# EAGLE board RP2040_MainV1_alternateLayout-LAPTOP-I81BU10P (EAGLE 9.6.2)
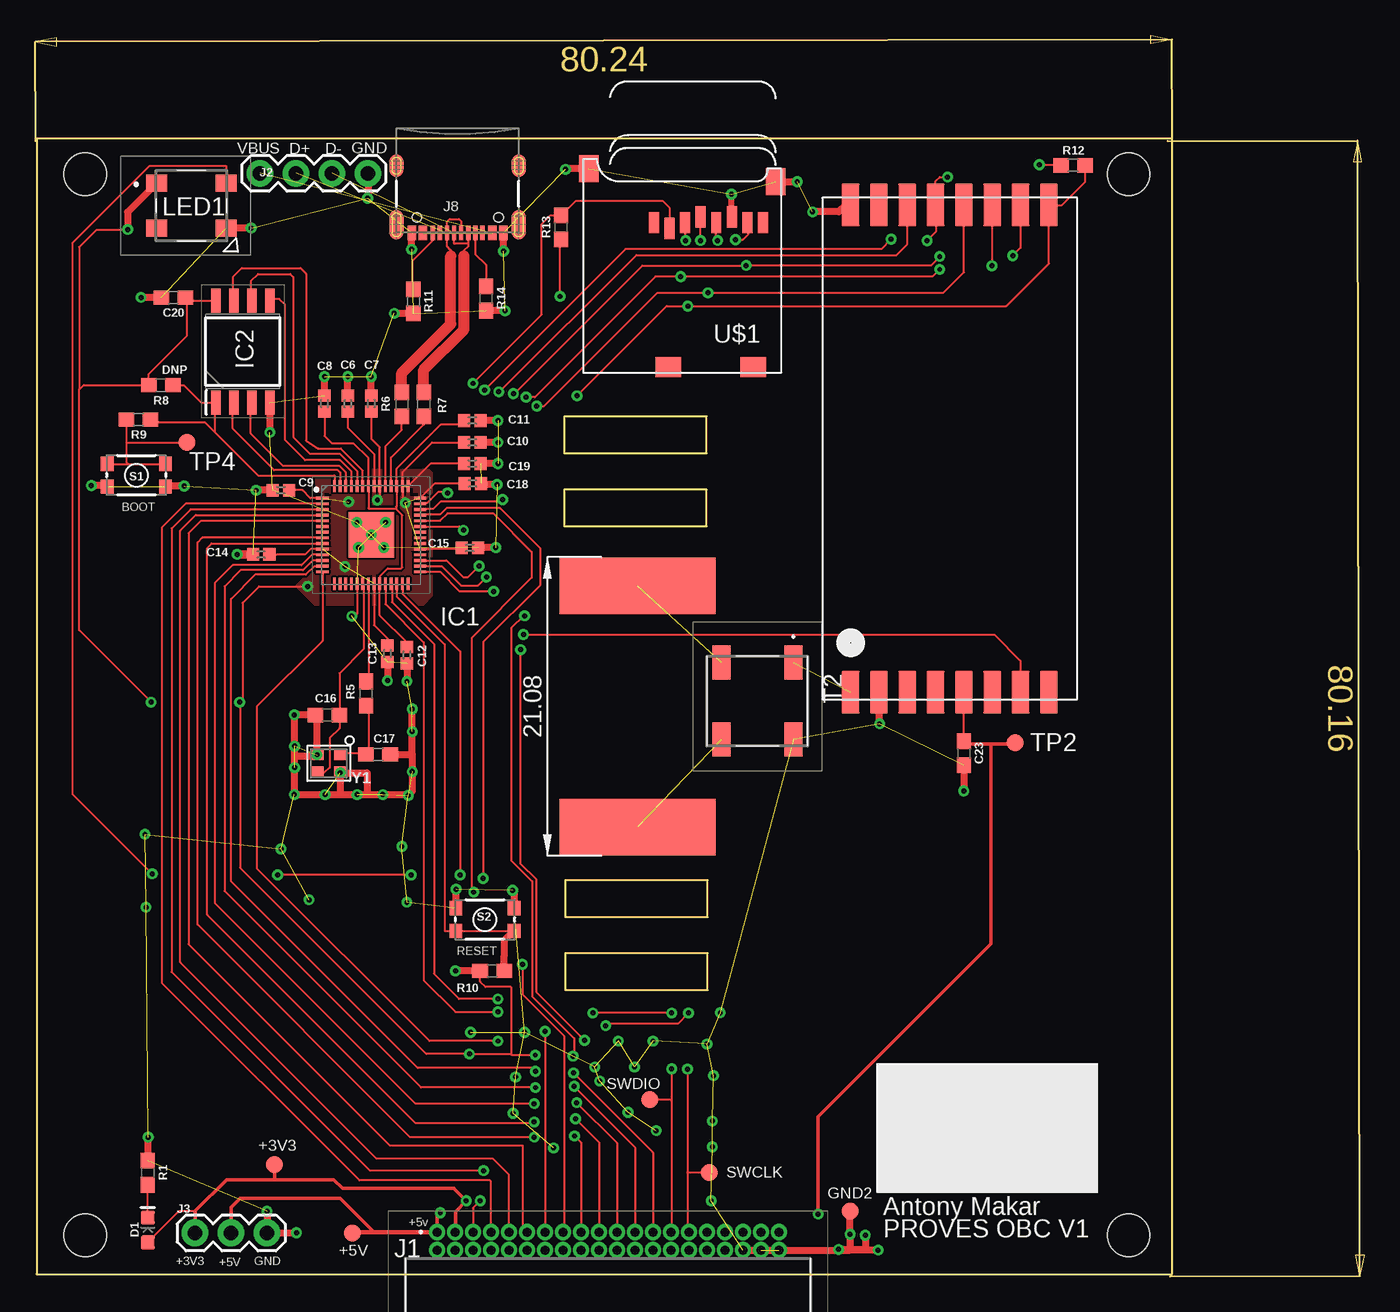
[diagram p0: board, top side]
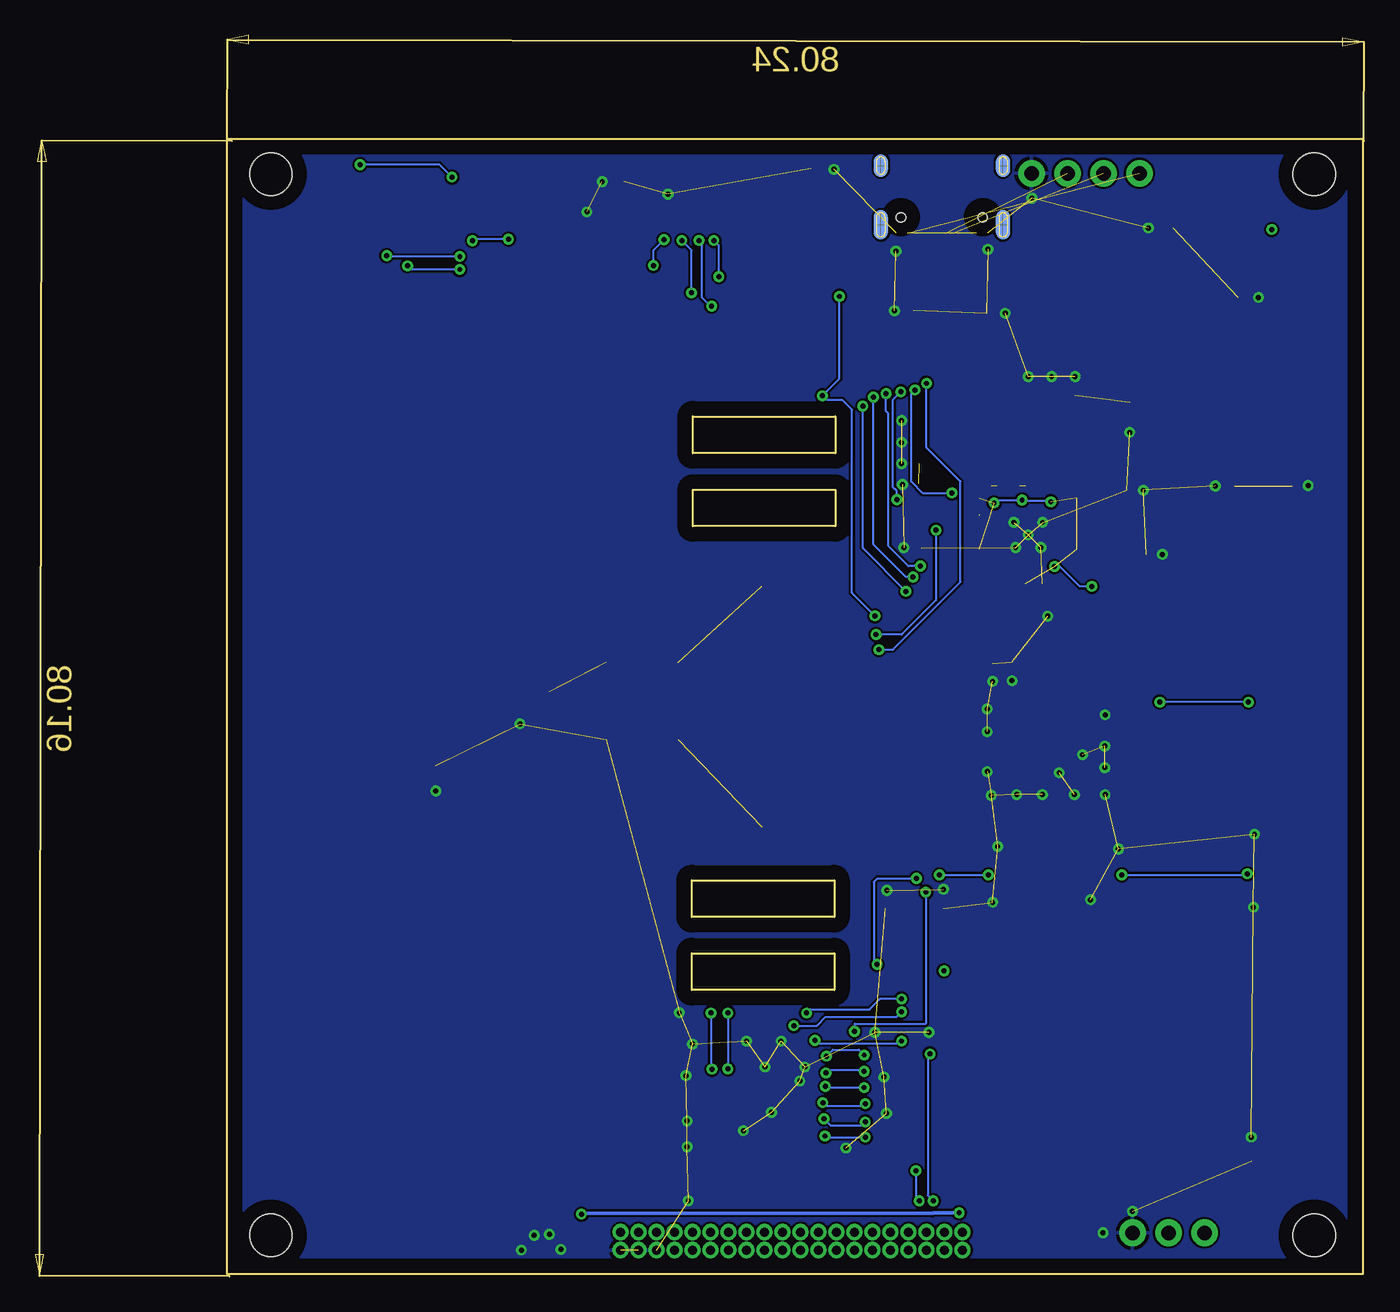
[diagram p1: board, bottom side, seen from below]

Size 80.16 x 80.16 mm. Coordinates in mm from the lower left corner, seen from the top.
Outline: 0,80.16 0,0 80.16,0 80.16,80.16 0,80.16
Outline: 37.24,55.4 37.24,52.81 47.29,52.81 47.29,55.4 37.24,55.4
Outline: 37.24,60.55 37.24,57.96 47.29,57.96 47.29,60.55 37.24,60.55
Outline: 37.31,22.66 37.31,20.07 47.37,20.07 47.37,22.66 37.31,22.66
Outline: 37.31,27.81 37.31,25.22 47.37,25.22 47.37,27.81 37.31,27.81
Copper layers (1*16): Top 0.035mm / dielectric 1.5mm / Bottom 0.035mm
Design rules "default *": minimum track width 6mil, minimum drill 0.35mm, track to track 6mil, track to pad 6mil, pad to pad 6mil, via to via 6mil, smd to smd 6mil, copper to edge 40mil, drill to drill 6mil, minimum pad ring 10mil, minimum via ring 8mil, stop-mask expansion 2mil, vias tented up to drill 40mil, thermal gap 10mil
Holes 3 mm at 3.43,2.74 3.43,77.67 77.09,2.74 77.09,77.67

## Footprints (pad centres in the part's own frame; a part is rotated, then mirrored left to right if it is on the bottom)
TP12R = smd 1.2 x 1.2: TP 0,0
0402 = smd 0.85 x 0.9: 1 -0.58,0; 2 0.58,0
0603 = smd 1.1 x 1: 1 -0.85,0; 2 0.85,0
LED-0603 = smd 1 x 1: A -0.877,0; C 0.877,0
QFN40P700X700X90-57N = smd 0.85 x 0.2: 1 -3.45,2.6; 2 -3.45,2.2; 3 -3.45,1.8; 4 -3.45,1.4; 5 -3.45,1; 6 -3.45,0.6; 7 -3.45,0.2; 8 -3.45,-0.2; 9 -3.45,-0.6; 10 -3.45,-1; 11 -3.45,-1.4; 12 -3.45,-1.8; 13 -3.45,-2.2; 14 -3.45,-2.6; 29 3.45,-2.6; 30 3.45,-2.2; 31 3.45,-1.8; 32 3.45,-1.4; 33 3.45,-1; 34 3.45,-0.6; 35 3.45,-0.2; 36 3.45,0.2; 37 3.45,0.6; 38 3.45,1; 39 3.45,1.4; 40 3.45,1.8; 41 3.45,2.2; 42 3.45,2.6 | smd 0.2 x 0.85: 15 -2.6,-3.45; 16 -2.2,-3.45; 17 -1.8,-3.45; 18 -1.4,-3.45; 19 -1,-3.45; 20 -0.6,-3.45; 21 -0.2,-3.45; 22 0.2,-3.45; 23 0.6,-3.45; 24 1,-3.45; 25 1.4,-3.45; 26 1.8,-3.45; 27 2.2,-3.45; 28 2.6,-3.45; 43 2.6,3.45; 44 2.2,3.45; 45 1.8,3.45; 46 1.4,3.45; 47 1,3.45; 48 0.6,3.45; 49 0.2,3.45; 50 -0.2,3.45; 51 -0.6,3.45; 52 -1,3.45; 53 -1.4,3.45; 54 -1.8,3.45; 55 -2.2,3.45; 56 -2.6,3.45 | smd 3.2 x 3.2: 57 0,0
SOIC127P790X216-8N = smd 1.7 x 0.65: 1 -3.6,1.905; 2 -3.6,0.635; 3 -3.6,-0.635; 4 -3.6,-1.905; 5 3.6,-1.905; 6 3.6,-0.635; 7 3.6,0.635; 8 3.6,1.905
TFM-120-01-XXX-D-RA = drill 0.635 pad 1: 1 0,0; 2 0,1.27; 3 -1.27,0; 4 -1.27,1.27; 5 -2.54,0; 6 -2.54,1.27; 7 -3.81,0; 8 -3.81,1.27; 9 -5.08,0; 10 -5.08,1.27; 11 -6.35,0; 12 -6.35,1.27; 13 -7.62,0; 14 -7.62,1.27; 15 -8.89,0; 16 -8.89,1.27; 17 -10.16,0; 18 -10.16,1.27; 19 -11.43,0; 20 -11.43,1.27; 21 -12.7,0; 22 -12.7,1.27; 23 -13.97,0; 24 -13.97,1.27; 25 -15.24,0; 26 -15.24,1.27; 27 -16.51,0; 28 -16.51,1.27; 29 -17.78,0; 30 -17.78,1.27; 31 -19.05,0; 32 -19.05,1.27; 33 -20.32,0; 34 -20.32,1.27; 35 -21.59,0; 36 -21.59,1.27; 37 -22.86,0; 38 -22.86,1.27; 39 -24.13,0; 40 -24.13,1.27
1X04 = drill 1.016 pad 1.88: 1 0,0; 2 2.54,0; 3 5.08,0; 4 7.62,0
1X03 = drill 1.016 pad 1.88: 1 0,0; 2 2.54,0; 3 5.08,0
USB-C-16P-4LAYER-ISOLATED = smd 0.3 x 1: A5 -1.25,-0.34; A6 -0.25,-0.34; A7 0.25,-0.34; A8 1.25,-0.34; B5 1.75,-0.34; B6 0.75,-0.34; B7 -0.75,-0.34; B8 -1.75,-0.34 | smd 0.6 x 1: GND -3.225,-0.34; GND2 3.225,-0.34; VBUS1 -2.45,-0.34; VBUS2 2.45,-0.34 | smd 1 x 2.1: SHLD1 -4.32,-0.915; SHLD2 4.32,-0.915 | smd 1 x 2.1 bottom: SHLD3 -4.32,-0.915; SHLD4 4.32,-0.915 | smd 1 x 1.6: SHLD5 -4.32,-5.095; SHLD8 4.32,-5.095 | smd 1 x 1.6 bottom: SHLD6 -4.32,-5.095; SHLD7 4.32,-5.095 | hole 0.65: -2.89,-1.445; 2.89,-1.445
ILPHK501RGBWSK68120501 = smd 1.5 x 1.2: 1 -2.45,1.6; 2 2.45,1.6; 3 2.45,-1.6; 4 -2.45,-1.6
TACTILE_SWITCH_SMD_4.6X2.8MM = smd 0.9 x 1: 1 -2.05,-0.8; 2 2.05,-0.8; 3 2.05,0.8; 4 -2.05,0.8
MABA010441CT38A0 = smd 1.27 x 2.4: 1 -2.54,-2.725; 2 2.54,-2.725; 3 2.54,2.725; 4 -2.54,2.725
MICROSD = smd 0.7 x 1.5: 1 9,-10.64; 2 7.9,-10.24; 3 6.8,-10.64; 4 5.7,-11.04; 5 4.6,-10.64; 6 3.5,-11.04; 7 2.4,-10.64; 8 1.3,-10.64 | smd 1.8 x 1.4: CD1 2,-0.44; CD2 8,-0.44 | smd 1.4 x 1.9: MT1 0.4,-13.54; MT2 13.6,-14.44
RFM95PW = smd 3 x 1.25: 3V3 17.2,-7; ANT -17.2,7; DIO0 -17.2,-3; DIO1 -17.2,-5; DIO2 -17.2,-7; DIO3 -17.2,3; DIO4 -17.2,1; DIO5 17.2,5; GND@0 -17.2,5; GND@1 17.2,7; MISO 17.2,-5; MOSI 17.2,-3; NSS 17.2,1; RST 17.2,3; SCK 17.2,-1; VCC -17.2,-1
BIGPADS = smd 3.988 x 10.998: P$1 -15.24,-2.54; P$2 1.778,-2.54
CRYSTAL_2.5X2 = smd 0.9 x 0.8: 1 -0.825,-0.625; 2 0.825,-0.625; 3 0.825,0.625; 4 -0.825,0.625

## Placement (x,y rotation side)
+3V3TP  TPTP12R  [TP12R]  16.79,7.75 0 top
+5VTP  TPTP12R  [TP12R]  22.3,2.92 0 top
C6  100nF  [0402]  21.97,61.47 90 top
C7  100nF  [0402]  23.62,61.47 90 top
C8  100nF  [0402]  20.32,61.47 90 top
C9  100nF  [0402]  17.25,55.35 180 top
C10  1uF  [0402]  30.76,58.72 0 top
C11  1uF  [0402]  30.76,60.27 0 top
C12  100nF  [0402]  26.14,43.71 90 top
C13  100nF  [0402]  24.76,43.81 90 top
C14  100nF  [0402]  15.85,50.83 180 top
C15  100nF  [0402]  30.58,51.28 0 top
C16  20pF  [0603]  20.52,39.47 0 top
C17  20pF  [0603]  24.1,36.7 180 top
C18  100nF  [0402]  30.78,55.83 180 top
C19  100nF  [0402]  30.76,57.23 180 top
C20  100nF  [0603]  9.65,68.96 180 top
C23  10uF  [0603]  65.46,36.78 270 top
D1  Green  [LED-0603]  7.85,3.12 90 top
GND2  TPTP12R  [TP12R]  57.43,4.47 0 top
IC1  RP2040  [QFN40P700X700X90-57N]  23.62,52.2 0 top
IC2  GD25Q64CSIGR  [SOIC127P790X216-8N]  14.55,65.15 90 top
J1  TFM-120-01-L-D-RA  [TFM-120-01-XXX-D-RA]  28.27,2.97 180 top
J2  455-1750-1-ND  [1X04]  23.39,77.72 180 top
J3  455-1750-1-ND  [1X03]  11.18,2.92 0 top
J8  USB Female Type C Connector  [USB-C-16P-4LAYER-ISOLATED]  29.72,73.18 180 top
LED1  ILPH-K501-RGBW-SK6812-05-01  [ILPHK501RGBWSK68120501]  10.92,75.44 0 top
R1  1k  [0603]  7.85,7.16 270 top
R5  1k  [0603]  23.27,41 270 top
R6  27  [0603]  25.78,61.42 270 top
R7  27  [0603]  27.33,61.42 270 top
R8  DNP  [0603]  8.76,62.76 180 top
R9  1k  [0603]  7.19,60.35 180 top
R10  10k  [0603]  32.16,21.41 0 top
R11  5.1k  [0603]  26.59,68.68 270 top
R12  10k  [0603]  73.18,78.28 0 top
R13  10k  [0603]  37.03,73.91 90 top
R14  5.1k  [0603]  31.72,68.88 270 top
S1  MOMENTARY-SWITCH-SPST-SMD-4.6X2.8MM  [TACTILE_SWITCH_SMD_4.6X2.8MM]  7.04,56.41 180 top
S2  MOMENTARY-SWITCH-SPST-SMD-4.6X2.8MM  [TACTILE_SWITCH_SMD_4.6X2.8MM]  31.65,25.04 0 top
SWCLK  TPTP12R  [TP12R]  47.47,7.16 0 top
SWDIO  TPTP12R  [TP12R]  43.28,12.34 0 top
T2  MABA-010441-CT38A0  [MABA010441CT38A0]  50.88,40.46 180 top
TP2  TPTP12R  [TP12R]  69.09,37.52 0 top
TP4  TPTP12R  [TP12R]  10.59,58.75 0 top
U$1  MICROSD  [MICROSD]  52.58,63.6 180 top
U$2  RFM95W  [RFM95PW]  64.47,58.29 90 top
U$4  BIGPAD  [BIGPADS]  39.88,46.81 90 top
Y1  [CRYSTAL_2.5X2]  20.62,36.07 180 top

## Library data of the parts
+3V3TP +5VTP GND2 SWCLK SWDIO TP2 TP4 = testpad
C6-C15 C18 C19 = SparkFun-Capacitors; PROD_ID: CAP-15083
C16 C17 = SparkFun-Capacitors; PROD_ID: CAP-00867
C20 = SparkFun-Capacitors; PROD_ID: CAP-00810
C23 = SparkFun-Capacitors; PROD_ID: CAP-11015
D1 = SparkFun-LED; PROD_ID: DIO-16512
IC1 = RP2040; DESCRIPTION: Microcontroller in QFN Package; HEIGHT: 0.9mm; MANUFACTURER_NAME: RASPBERRY-PI; MANUFACTURER_PART_NUMBER: RP2040
IC2 = GD25Q64CSIGR; DESCRIPTION: NOR Flash 64Mbit NOR Flash /3.3V /SOP8 208mil /Industrial(-40? to +85?) /T&R; HEIGHT: 2.16mm; MANUFACTURER_NAME: GigaDevice; MANUFACTURER_PART_NUMBER: GD25Q64CSIGR; MOUSER_PART_NUMBER: 363-GD25Q64CSIGR; MOUSER_PRICE-STOCK: https://www.mouser.co.uk/ProductDetail/GigaDevice/GD25Q64CSIGR?qs=RcG8xmE7yp10Jy7JYr5cRA%3D%3D
J1 = TFM-120-01-L-D-RA; ARROW_PART_NUMBER: TFM-120-01-L-D-RA; ARROW_PRICE-STOCK: https://www.arrow.com/en/products/tfm-120-01-l-d-ra/samtec; DESCRIPTION: 40 Position, High-Reliability Tiger Eye&trade; Terminal Strips, .050&quot; Pitch, Right Angle; HEIGHT: mm; MANUFACTURER_NAME: SAMTEC; MANUFACTURER_PART_NUMBER: TFM-120-01-L-D-RA; MOUSER_PART_NUMBER: 200-TFM12001LDRA; MOUSER_PRICE-STOCK: https://www.mouser.co.uk/ProductDetail/Samtec/TFM-120-01-L-D-RA?qs=Cqqh%252BS766wlg5fYnQYSkEA%3D%3D
J2 = SparkFun-Connectors; PROD_ID: CONN-09696
J3 = SparkFun-Connectors; PROD_ID: XXX-00000
J8 = SparkFun-Connectors; PROD_ID: CONN-14122
LED1 = ILPH-K501-RGBW-SK6812-05-01; DESCRIPTION: Pack of 10 RGBW 5050 LED 10mm PCB Star, PK; HEIGHT: 1.7mm; MANUFACTURER_NAME: Intelligent LED Solutions; MANUFACTURER_PART_NUMBER: ILPH-K501-RGBW-SK6812-05-01
R1 R5-R14 = SparkFun-Resistors; PROD_ID: RES-12535
S1 S2 = SparkFun-Switches; PROD_ID: SWCH-15606
T2 = MABA-010441-CT38A0; DESCRIPTION: Audio Transformers / Signal Transformers 5-1200MHz 1:3 Imped. 50 or 75 Ohm; HEIGHT: 3.43mm; MANUFACTURER_NAME: MACOM; MANUFACTURER_PART_NUMBER: MABA-010441-CT38A0; MOUSER_PART_NUMBER: 937-MABA10441-CT38A0; MOUSER_PRICE-STOCK: https://www.mouser.co.uk/ProductDetail/MACOM/MABA-010441-CT38A0?qs=uBHE7zYsG8UajKCSi2fvlA%3D%3D
U$1 = adafruit
U$2 = rfm
U$4 = bigpad - Copy
Y1 = microbuilder

## Nets
31: J1.31
+1V1: C8.1 C11.1 C12.2 IC1.23 IC1.45 IC1.50
+3V3: +3V3TP.TP C6.1 C7.1 C9.1 C10.1 C13.2 C14.1 C15.1 C18.2 C19.2 C20.1 D1.A IC1.1 IC1.10 IC1.22 IC1.33 IC1.42 IC1.43 IC1.44 IC1.48 IC1.49 IC2.8 J1.3 J3.1 LED1.1 R8.2 R10.1 R12.2 R13.1 U$1.4 U$2.3V3
+5V: +5VTP.TP C23.1 J1.1 J3.2 TP2.TP U$2.VCC
A0: IC1.38 J1.13
A1: IC1.39 J1.15
ANT: T2.1 U$2.ANT
D4: IC1.8 J1.17
D5: IC1.9 J1.19
D6: IC1.11 J1.21
D9: IC1.12 J1.23
D10: IC1.13 J1.25
D12: IC1.15
D13: IC1.16
D24: IC1.36
DIN: IC1.27 LED1.2
DOUT: LED1.4
GND: C6.2 C7.2 C8.2 C9.2 C10.2 C11.2 C12.1 C13.1 C14.2 C15.2 C16.1 C17.1 C18.1 C19.1 C20.2 C23.2 GND2.TP IC1.19 IC1.57 IC2.4 J1.36 J1.38 J1.40 J2.1 J3.3 J8.GND J8.GND2 LED1.3 R1.1 R11.2 R14.2 S1.3 S1.4 S2.3 S2.4 T2.4 U$1.6 U$1.MT1 U$1.MT2 U$2.GND@0 U$2.GND@1
GPIO4: IC1.6
GPIO5: IC1.7
GPIO14: IC1.17
GPIO15: IC1.18
GPIO17: IC1.28
GPIO21: IC1.32
GPIO22: IC1.34
GPIO23: IC1.35
N$1: C17.2 R5.2 Y1.1
N$2: T2.2 U$4.P$2
N$3: J8.B5 R11.1
N$4: J8.A5 R14.1
N$5: T2.3 U$4.P$1
N$7: D1.C R1.2
N$23: J1.33
N$24: J1.35
N$25: J1.37
N$26: J1.39
N$30: J1.34
N$31: J1.32
N$32: J1.30
N$33: J1.28
N$34: J1.26
N$35: J1.24
N$36: J1.22
N$37: J1.20
N$38: J1.18
N$39: J1.16
N$40: J1.14
N$41: J1.12
N$42: J1.10
N$43: J1.8
N$44: J1.6
N$45: J1.4
N$46: J1.2
QSPI_SCLK: IC1.52 IC2.6
QSPI_SD0: IC1.53 IC2.5
QSPI_SD1: IC1.55 IC2.2
QSPI_SD2: IC1.54 IC2.3
QSPI_SD3: IC1.51 IC2.7
QSPI_SSN: IC1.56 IC2.1 R8.1 R9.1
RADIO-DIO1: IC1.37 U$2.DIO1
RADIO_CS: IC1.41 R12.1 U$2.NSS
RADIO_DIO0: U$2.DIO0
RADIO_DIO4: U$2.DIO4
RADIO_MISO: IC1.31 U$1.7 U$2.MISO
RADIO_MOSI: IC1.30 U$1.3 U$2.MOSI
RADIO_RESET: IC1.40 U$2.RST
RADIO_SCK: IC1.29 U$1.5 U$2.SCK
RUN: IC1.26 R10.2 S2.1 S2.2
RX: IC1.3 J1.5
SCL: IC1.5 J1.11
SD_CS: IC1.14 R13.2 U$1.2
SDA: IC1.4 J1.9
SWCLK: IC1.24 J1.29 SWCLK.TP
SWDIO: IC1.25 J1.27 SWDIO.TP
TX: IC1.2 J1.7
USB_BOOT: R9.2 S1.1 S1.2 TP4.TP
USB_DM\: IC1.46 R7.2
USB_DP: IC1.47 R6.2
USB_N: J2.2 J8.A7 J8.B7 R7.1
USB_P: J2.3 J8.A6 J8.B6 R6.1
VBUS: J2.4 J8.VBUS1 J8.VBUS2
XIN: C16.2 IC1.20 Y1.3
XOUT: IC1.21 R5.1

## Tracks (layer width: path | path; a pad name or v marks a point on that pad's centre or on a via)
+1V1
  Top 0.152: C11.1 29.88,59.97 28.52,59.97 25.42,56.87 IC1.45 25.42,54.23 25.38,54.18 25.38,54.05 | C12.2 26.14,44.6 24.22,46.52 IC1.23 24.22,49.27 24.78,49.84 25.73,49.84 25.81,49.91 25.81,53.59 25.38,54.03 25.38,54.05 | C8.1 20.32,59.18 20.83,58.67 22.35,58.67 23.42,57.61 IC1.50 23.42,54.07 23.44,54.05 25.37,54.05 25.38,54.05
+3V3  (via drill 0.35)  (8 unrouted)
  Top 0.152: IC1.49 23.82,57.91 21.97,59.76 C6.1 | C7.1 23.62,58.98 24.22,58.38 IC1.48 24.22,55 24.05,54.84 v24.05,54.66 | IC1.22 23.82,45.82 24.76,44.88 C13.2 | IC1.1 19.32,54.8 18.77,55.35 C9.1 | C15.1 29.99,51.25 29.94,51.2 IC1.33 | C18.2 30.19,55.81 28.09,55.81 IC1.42 | C10.1 27.91,58.73 25.82,56.63 IC1.44 25.82,55.27 25.83,55.26 25.83,54.66 v26.03,54.46 | C19.2 27.8,57.23 IC1.43 | R8.2 7.91,62.79 | 7.91,62.79 7.91,63.55 10.59,66.22 10.59,68.88 C20.1 10.71,68.75 IC2.8 | IC1.10 19.33,51.2 18.96,50.82 16.96,50.82 16.95,50.83 C14.1 | J1.3 29.57,3 | v19.13,48.56 15.7,48.56 14.53,47.4 14.53,40.59 v14.33,40.39 14.35,40.39 14.35,28.7 27.51,15.55 v30.56,15.55 33.49,15.55 | v6.43,73.76 6.38,73.71 4.19,73.71 3,72.52 3,62.46 | v8.08,40.39 3,45.47 3,62.46 | R10.1 31.31,20.65 31.69,20.27 33.49,20.27 33.49,15.55 | 46.88,75.35 U$1.4 46.86,74.63 v46.86,72.99 | v37.87,15.39 37.95,15.47 37.95,16.66 34.98,19.63 34.98,27.74 33.53,29.18 33.53,45.65 34.36,46.48 v34.44,46.48 | v35.2,15.47 33.57,15.47 33.49,15.55 | D1.A 10.07,4.47 11.2,4.47 | v38.15,62.02 44.48,68.35 v45.97,68.35 68.45,68.35 71.47,71.36 U$2.3V3 72.39,75.49 74.03,77.13 R12.2 | v36.96,69.04 36.96,72.99 R13.1 | 3,62.46 3.33,62.79 7.91,62.79
  Top 0.254: 29.57,3 29.57,4.42 v30.33,5.18 29.45,6.06 29.46,6.07 21.59,6.07 20.98,6.68 16.87,6.68 | J3.1 11.18,4.45 11.2,4.47 13.41,6.68 16.87,6.68 | 16.87,6.68 16.79,6.76 +3V3TP.TP
  Top 0.508: LED1.1 6.43,74.99 v6.43,73.76 | R10.1 v29.57,21.41
  Bottom 0.152: v30.33,5.18 30.71,5.56 30.71,15.39 v30.56,15.55 | v35.2,15.47 35.59,15.85 37.41,15.85 v37.87,15.39 | v8.08,40.39 v14.33,40.39 | v19.13,48.56 19.99,48.56 21.39,49.96 v21.77,49.96 | v22.02,54.53 22.09,54.61 24,54.61 v24.05,54.66 25.83,54.66 v26.03,54.46 | v34.44,46.48 36.07,48.11 36.07,61.04 36.75,61.72 37.85,61.72 v38.15,62.02 36.96,63.22 v36.96,69.04 | v45.97,68.35 46.04,68.35 46.66,68.96 46.66,72.78 v46.86,72.99
  pour Top: 19.74,56.77 19.74,50.01 18.31,48.59 19.61,47.29 27.31,47.29 27.91,47.9 27.91,56.57 27.71,56.77
+5V  (via drill 0.35)
  Top 0.152: 67.36,37.39 67.31,37.44 | C23.1 65.46,41.08 U$2.VCC
  Top 0.254: J1.1 28.27,4.12 v28.5,4.34 | v55.17,4.24 55.17,11.12 67.36,23.32 67.36,37.39 | 66.22,37.45 65.63,37.45 C23.1 | TP2.TP 69.01,37.44 67.31,37.44 65.65,37.44 65.37,37.71 | 23.82,2.97 21.44,5.36 14.35,5.36 13.72,4.72 J3.2
  Top 0.305: J1.1 23.82,2.97 22.35,2.97 +5VTP.TP
  Top 0.508: 65.37,37.71 C23.1
  Bottom 0.254: v28.5,4.34 30.31,4.34 30.36,4.3 55.12,4.3 v55.17,4.24
A0  (via drill 0.35)
  Top 0.152: IC1.38 28.49,53.2 29,53.7 32.25,53.7 34.95,51 34.95,49.17 30.71,44.93 30.71,26.98 v30.86,26.98 | v35.89,17.15 J1.13
  Bottom 0.152: v30.86,26.98 30.86,17.68 35.89,17.68 v35.89,17.15
A1  (via drill 0.35)  (1 unrouted)
  Top 0.152: 27.12,53.65 28.49,53.65 28.93,54.08 32.71,54.08 35.56,51.23 35.56,48.67 31.52,44.63 v31.52,27.94 | J1.15 37.24,3.05 37.24,16.81 34.29,19.76 v34.29,21.87
  Bottom 0.152: v34.29,21.87 34.52,22.1 34.52,27.68 34.26,27.94 v31.52,27.94
ANT  (1 unrouted)
D4  (via drill 0.35)
  Top 0.152: v35.13,9.68 26.37,9.68 11.35,24.69 11.35,51.66 11.69,52 IC1.8 | v37.97,9.75 38.43,9.3 J1.17
  Bottom 0.152: v37.97,9.75 37.97,9.68 v35.13,9.68
D5  (via drill 0.35)
  Top 0.152: v35.13,10.74 35.13,10.67 26.75,10.67 12.04,25.37 12.04,51.28 12.35,51.6 IC1.9 | v38.05,10.97 39.7,9.32 J1.19
  Bottom 0.152: v38.05,10.97 37.59,10.52 35.36,10.52 v35.13,10.74
D6  (via drill 0.35)
  Top 0.152: IC1.11 19.45,50.8 18.7,50.06 13.84,50.06 12.57,48.79 12.57,26.21 26.75,12.04 v35.13,12.04 | v38.12,12.12 40.97,9.27 J1.21
  Bottom 0.152: v35.13,12.04 35.28,11.89 37.9,11.89 v38.12,12.12
D9  (via drill 0.35)
  Top 0.152: v35.21,13.18 27.13,13.18 13.26,27.05 13.26,48.57 14.4,49.71 18.8,49.71 19.49,50.4 IC1.12 | v37.95,13.26 42.24,8.97 J1.23
  Bottom 0.152: v37.95,13.26 37.95,13.18 v35.21,13.18
D10  (via drill 0.35)
  Top 0.152: v35.21,14.33 34.98,14.55 26.9,14.55 13.72,27.74 13.72,47.68 15.42,49.39 19,49.39 19.61,50 IC1.13 | v37.9,14.21 43.51,8.6 J1.25
  Bottom 0.152: v35.21,14.33 35.32,14.44 37.68,14.44 v37.9,14.21
DIN  (via drill 0.35)
  Top 0.152: IC1.27 25.82,48.04 29.9,43.97 v29.9,28.19 | v26.44,28.19 v17.02,28.19 | v8.15,28.27 2.54,33.88 2.54,72.82 7.98,78.26 13.37,78.26 LED1.2
  Bottom 0.152: v29.9,28.19 v26.44,28.19 | v17.02,28.19 8.23,28.19 v8.15,28.27
GND  (via drill 0.35)  (72 unrouted)
  Top 0.152: IC1.19 22.62,46.62 22.45,46.46 v22.25,46.46
  Top 0.406: U$1.6 49.05,74.67 v49.05,76.25
  Top 0.508: C9.2 v15.49,55.35 | v32.56,60.27 C11.2 | v32.56,58.73 C10.2 | v32.56,57.23 C19.1 | C18.1 31.44,55.75 v32.51,55.75 | C15.2 31.19,51.31 v32.41,51.31 | C8.2 v20.32,63.37 | C6.2 v21.97,63.37 | C7.2 v23.62,63.37 | C20.2 v7.37,68.96 | v15.14,73.86 15.11,73.84 LED1.3 | C13.1 v24.76,41.91 | C12.1 v26.14,41.86 | S2.4 29.6,27.18 v29.62,27.18 | v33.6,27.1 33.7,27.01 S2.3 | S1.3 4.92,55.68 v3.86,55.68 | v10.41,55.65 9.12,55.65 S1.4 | IC2.4 v16.46,59.44 | C23.2 v65.46,34.11 | U$1.MT2 37.38,78.04 v37.34,78 | U$1.MT1 v53.69,77.14 v53.7,77.14 | U$2.GND@1 57.11,75.49 56.62,75.01 v54.79,75.01 | J1.36 J1.40 56.57,1.7 v56.62,1.75 | 57.43,1.7 56.67,1.7 v56.62,1.75 | v56.62,1.75 58.5,1.75 v58.5,2.74 | v59.41,1.7 57.43,1.7 | 57.43,1.7 v57.43,2.82 GND2.TP | R11.2 v25.25,67.84 | v33.07,68.02 31.74,68.02 R14.2 | J8.GND2 26.47,73.49 v26.47,72.36 | v32.97,72.24 32.94,72.26 J8.GND | U$2.GND@0 59.47,39.14 59.51,39.09 v59.51,38.86 | 18.19,36.55 v18.19,39.5 18.21,39.47 C16.1 19.79,39.36 v19.79,36.68 19.66,36.55 18.19,36.55 | 18.19,36.55 v18.19,33.86 21.44,33.86 | 21.44,33.86 23.32,33.86 | 23.32,33.86 26.19,33.86 v26.24,33.81 26.52,34.09 26.52,36.7 | 26.52,36.7 v26.52,39.9 | C17.1 26.52,36.7 | 21.44,33.86 v21.44,35.41 23.32,35.41 23.34,35.38 23.34,33.88 23.32,33.86 | J2.1 23.39,76 v23.37,75.97 | v16.26,4.45 J3.3 v18.34,2.92 | R1.1 7.87,8.04 v7.87,9.68
  Top 0.61: C14.2 v14.15,50.83
  other vias: 22.61,53.09 24.64,53.09 22.73,51.31 24.51,51.31 23.62,52.2 22.63,33.86 26.52,35.48 24.43,33.86 26.52,38.3 20.37,33.86 18.21,35.76 18.21,37.29 41.07,16.46 39.4,14.63 30.63,17.07 43.74,10.13 47.78,14.02 47.62,5.18 47.7,10.82 41.76,11.43 47.7,8.99 33.63,11.35 39.75,13.64 33.81,13.92 47.32,16.26 43.51,16.46 42.21,14.63 48.26,18.47 34.44,17.07 36.5,8.92 17.25,30.02 7.65,31.06 7.72,25.91 19.23,26.44 25.78,30.2 26.14,26.26
  pour Bottom: 1.19,89.33 -4.39,83.74 -4.39,-4.85 88.11,-4.85 89.64,-3.33 89.64,82.45 83.18,88.9 1.6,88.9 1.19,89.31
N$1
  Top 0.152: R5.2 23.42,39.99 23.42,36.87 C17.2 23.2,36.75 21.58,36.75 21.5,36.68 21.47,36.68 Y1.1
N$2  (1 unrouted)
N$3
  Top 0.152: J8.B5 27.97,72.98 26.52,71.54 26.52,69.61 R11.1
N$4
  Top 0.152: J8.A5 30.97,72.02 31.72,71.26 R14.1
N$5  (1 unrouted)
N$7
  Top 0.152: D1.C R1.2
QSPI_SCLK
  Top 0.152: IC1.52 22.63,56.69 21.41,57.91 19.3,57.91 18.11,59.11 18.11,70.41 17.91,70.61 15.62,70.61 15.11,70.1 15.11,68.83 IC2.6
QSPI_SD0
  Top 0.152: IC1.53 22.22,56.67 21.41,57.48 18.95,57.48 17.53,58.9 17.53,68.45 17.12,68.86 16.57,68.86 IC2.5
QSPI_SD1
  Top 0.152: IC1.55 21.43,56.6 21.26,56.77 16.76,56.77 13.84,59.69 13.84,61.48 IC2.2
QSPI_SD2
  Top 0.152: IC1.54 21.83,56.63 21.38,57.07 17.4,57.07 15.11,59.36 15.11,61.48 IC2.3
QSPI_SD3
  Top 0.152: IC1.51 23.02,56.73 21.46,58.29 19.88,58.29 19.02,58.86 19.02,70.64 18.62,71.04 14.48,71.04 13.84,70.4 13.84,68.83 IC2.7
QSPI_SSN
  Top 0.152: IC1.56 21.02,56.39 15.63,56.39 12.61,59.41 | R8.1 10.39,62.76 11.61,61.55 IC2.1 12.61,61.51 12.61,59.41 | 12.61,59.41 11.9,60.12 8.27,60.12 R9.1
RADIO-DIO1  (via drill 0.35)
  Top 0.152: 69.56,41.19 U$2.DIO1 69.47,43.31 67.61,45.16 v34.37,45.16 | IC1.37 29.85,52.8 v30.12,52.53
  Bottom 0.152: v30.12,52.53 30.12,47.6 32.56,45.16 v34.37,45.16
RADIO_CS  (via drill 0.35)
  Top 0.152: v64.31,77.47 63.75,77.47 63.45,77.17 63.45,75.29 63.46,75.39 U$2.NSS 63.5,75.46 63.5,73.61 v62.86,72.97 | v70.79,78.33 72.28,78.33 R12.1 | IC1.41 27.14,54.47 27.59,54.47 28.34,55.22 28.96,55.22 v29.01,55.17 | v60.33,73.07 59.63,72.38 41.57,72.38 v31.62,62.43
  Bottom 0.152: v64.31,77.47 65.18,78.33 v70.79,78.33 | v29.01,55.17 31.09,55.17 31.88,55.96 31.88,62.18 v31.62,62.43 | v60.33,73.07 62.77,73.07 v62.86,72.97
RADIO_MISO  (via drill 0.35)
  Top 0.152: U$1.7 50.25,74.17 50.25,73.44 49.85,73.05 v49.34,73.05 | IC1.31 28.93,50.4 30.1,49.23 30.47,49.23 v31.23,50 | v33.66,62.18 33.73,62.18 42.77,71.22 v50.09,71.22 63.12,71.22 v63.75,71.85 | U$2.MISO 69.47,72.47 v68.91,71.91
  Bottom 0.152: v31.23,50 32.09,50 33.5,51.41 33.5,60.78 33.66,60.93 v33.66,62.18 | v68.91,71.91 68.85,71.85 v63.75,71.85 | v50.09,71.22 50.09,72.3 v49.34,73.05
RADIO_MOSI  (via drill 0.35)
  Top 0.152: v31.75,49.23 31.12,48.6 29.99,48.6 28.6,50 IC1.30 | v63.75,70.94 63.25,70.43 v45.47,70.43 43.69,70.43 35.18,61.92 v34.54,61.92 | v67.44,71.2 67.47,71.22 U$2.MOSI | v45.82,72.99 45.82,74.2 U$1.3
  Bottom 0.152: v31.75,49.23 32.26,49.23 34.54,51.51 v34.54,61.92 | v63.75,70.94 67.18,70.94 v67.44,71.2 | v45.47,70.43 45.47,72.63 v45.82,72.99
RADIO_RESET  (via drill 0.35)
  Top 0.152: 61.45,75.48 U$2.RST 61.47,72.72 60.71,71.96 42.35,71.96 32.69,62.31 v32.62,62.31 | IC1.40 27.1,54.02 27.99,54.02 28.52,54.56 32.77,54.56 v32.89,54.69
  Bottom 0.152: v32.89,54.69 32.89,55.28 33.17,55.55 33.17,61.76 v32.62,62.31
RADIO_SCK  (via drill 0.35)
  Top 0.152: IC1.29 28.47,49.6 29.86,48.21 v32.26,48.21 | v35.31,61.29 35.81,61.29 43.81,69.29 v47.4,69.29 64.01,69.29 65.47,70.75 U$2.SCK | v48.08,72.99 47.98,73.09 U$1.5
  Bottom 0.152: v32.26,48.21 35.31,51.26 v35.31,61.29 | v47.4,69.29 47.4,72.3 v48.08,72.99
RUN
  Top 0.152: IC1.26 25.42,47.86 28.8,44.48 28.8,24.23 29.59,24.23 S2.1 S2.2
  Top 0.508: S2.2 33.01,23.56 33.01,22.48 R10.2
RX  (via drill 0.35)
  Top 0.152: IC1.3 10.87,54 9.53,52.65 9.53,21.34 23.55,7.32 v31.55,7.32 | v31.32,5.18 30.81,4.67 J1.5
  Bottom 0.152: v31.55,7.32 31.55,5.41 v31.32,5.18
SCL
  Top 0.152: IC1.5 11.58,53.19 10.72,52.33 10.72,23.29 24.94,9.07 34.31,9.07 34.31,3.28 J1.11
SD_CS  (via drill 0.35)
  Top 0.152: IC1.14 20.17,44.71 15.54,40.08 15.54,28.65 27.74,16.46 v32.56,16.46 | U$1.2 44.68,75.31 44.2,75.79 38.06,75.79 R13.2 36.28,74.76 35.66,74.14 35.66,67.76 v30.8,62.9 | v38.68,16.51 35.28,19.91 35.28,27.86 34.16,28.98 v34.16,44.1
  Bottom 0.152: v38.68,16.51 38.48,16.31 32.72,16.31 v32.56,16.46 | v34.16,44.1 33.17,44.1 28.4,48.87 28.4,55.97 30.8,58.38 v30.8,62.9
SDA
  Top 0.152: IC1.4 11.23,53.6 10.13,52.5 10.13,22.02 24,8.15 32.21,8.15 33.35,7.01 J1.9
SWCLK  (via drill 0.35)
  Top 0.152: IC1.24 24.62,47.31 27.33,44.6 27.33,20.75 29.57,18.52 v32.56,18.52 | v40.17,17.54 40.31,17.68 45.26,17.68 v46.03,18.44 | v45.95,14.48 45.95,7.16 | 45.95,7.16 45.95,3.07 J1.29 | SWCLK.TP 45.95,7.16
  Bottom 0.152: v32.56,18.52 32.92,18.16 37.93,18.16 38.55,17.54 v40.17,17.54 | v46.03,18.44 46.03,14.55 v45.95,14.48
SWDIO  (via drill 0.35)
  Top 0.152: IC1.25 25.09,48.67 25.09,47.45 28.04,44.5 28.04,21.21 29.82,19.43 v32.56,19.43 | v44.83,18.44 v39.27,18.44 | v44.83,14.5 44.81,14.48 44.81,12.27 | J1.27 44.81,3 44.81,12.27 | SWDIO.TP 44.73,12.34 44.81,12.27
  Bottom 0.152: v32.56,19.43 34.09,19.43 34.82,18.69 39.01,18.69 v39.27,18.44 | v44.83,18.44 v44.83,14.5
TX
  Top 0.152: IC1.2 10.51,54.4 8.84,52.73 8.84,20.57 22.78,6.63 32,6.63 32.08,6.55 J1.7
USB_BOOT
  Top 0.152: S1.2 6.48,57.21 | 6.48,57.21 S1.1 | 6.34,58.72 6.36,58.7 10.55,58.7 TP4.TP | R9.2 6.34,58.72 | 6.34,58.72 6.34,57.35 6.48,57.21
USB_DM\
  Top 0.152: IC1.46 25.02,57.66 27.33,59.97 R7.2
USB_DP
  Top 0.152: IC1.47 24.62,58.45 25.78,59.61 R6.2
USB_N  (1 unrouted)
  Top 0.152: R7.1 27.33,62.34 | J8.B7 30.45,73.53 | J8.B7 | 30.17,71.91 30.17,72.29 30.48,72.59 30.48,72.77 | 30.48,72.77 J8.B7 | 30.48,72.77 30.45,72.75 29.51,72.75 29.47,72.79 J8.A7
  Top 0.787: 27.33,62.34 27.33,63.86 30.17,66.7 30.17,71.91
USB_P  (1 unrouted)
  Top 0.152: R6.1 25.78,62.32 | 29.23,71.91 29.23,72.31 28.97,72.58 J8.B6 28.97,74.31 29.16,74.5 29.82,74.5 29.97,74.35 J8.A6
  Top 0.787: 25.78,62.32 25.78,63.64 29.23,67.09 29.23,71.91
VBUS  (2 unrouted)
  Top 0.152: J8.VBUS2 27.27,73.21
XIN
  Top 0.152: IC1.20 23.07,48.7 23.07,44.13 21.37,42.43 C16.2 21.37,38.53 20.69,37.85 20.69,35.77 20.29,35.44 Y1.3
XOUT
  Top 0.152: IC1.21 23.42,48.62 23.42,42 R5.1

## Text on the board
tNames: VBUS | D+ | D- | GND | BOOT | RESET | +3V3 | Antony Makar | +5v | PROVES OBC V1 | GND | +5V | +3V3 | +5V